# Altium PCB PCB1.PcbDoc
Units mil, origin at the board's own origin, x right, y up, seen from the top; angles counter-clockwise.
Board outline 3260 x 2455 mil, 2 copper layers (Top Layer, Bottom Layer); 47 components, 53 nets, 249 pads, 18 vias.
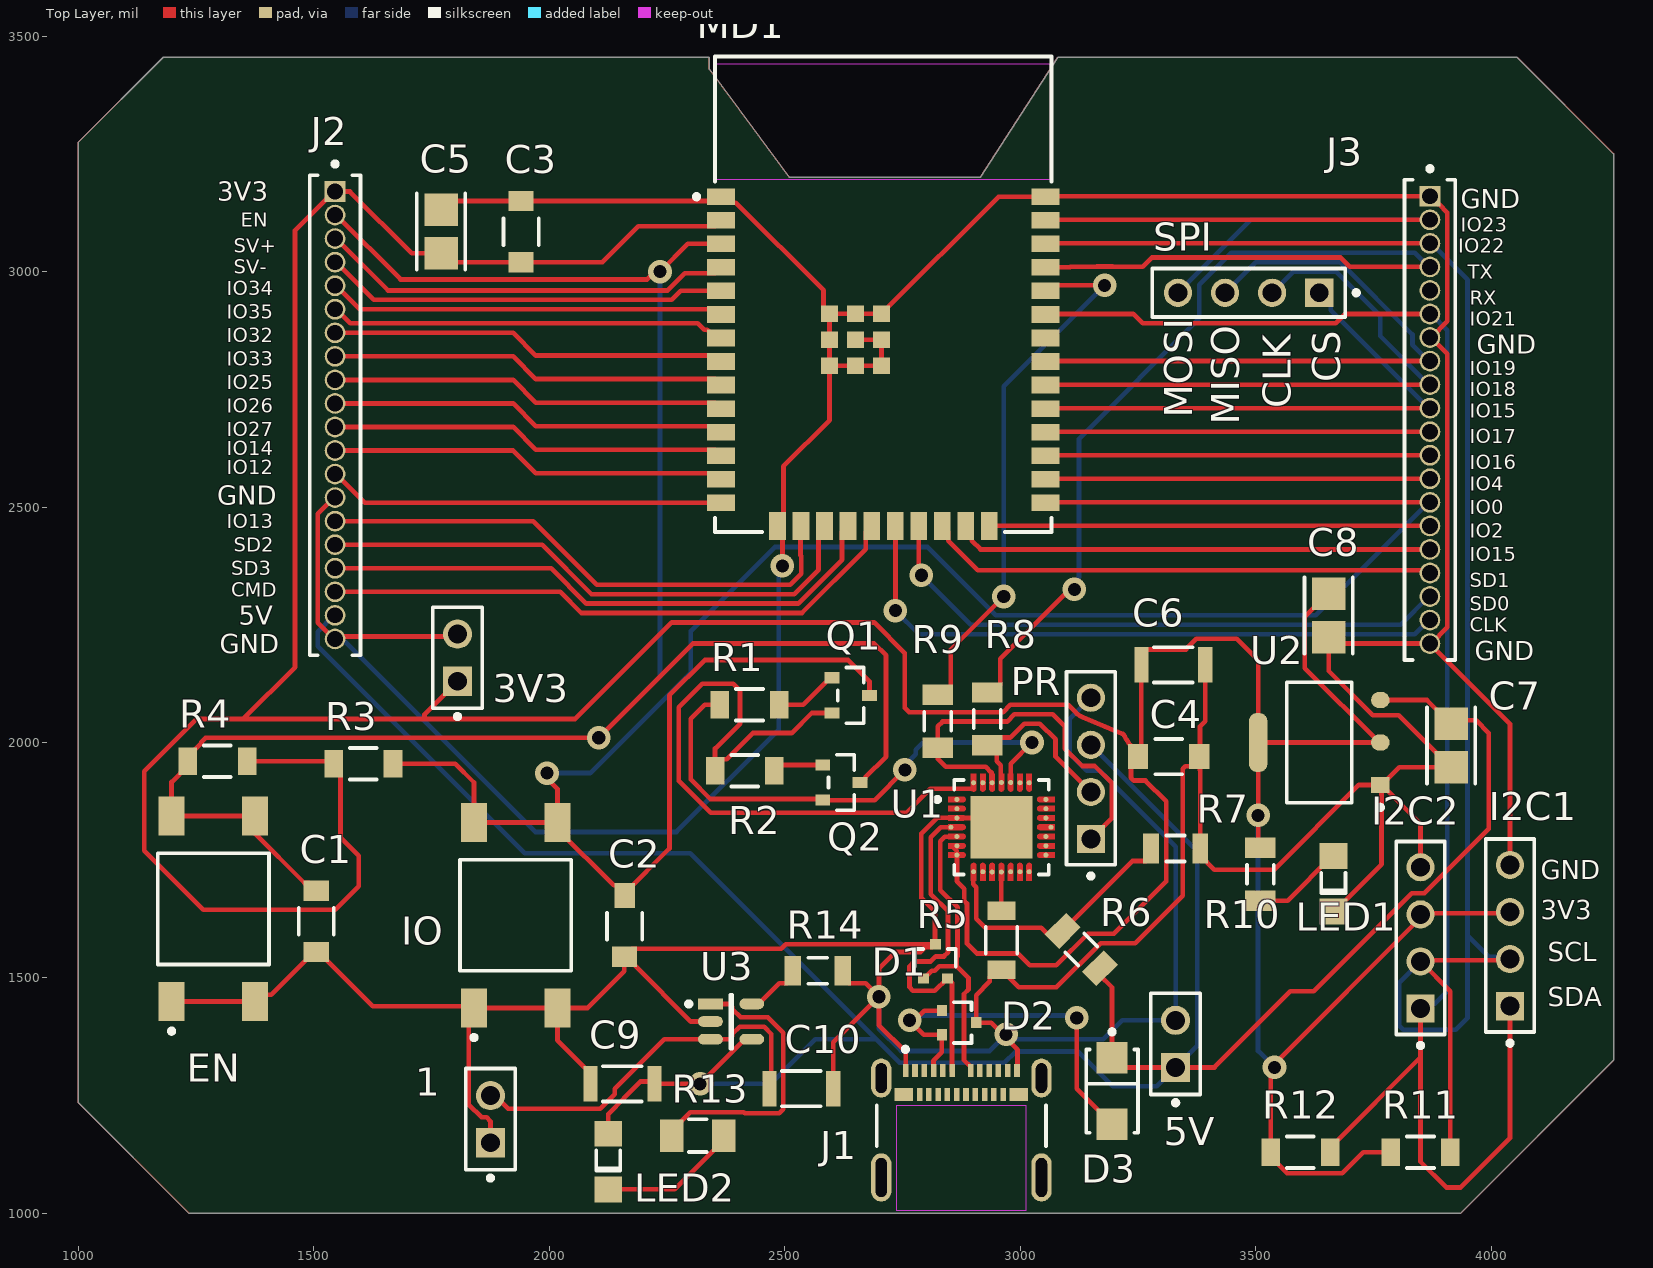
[diagram p0: Top Layer view]
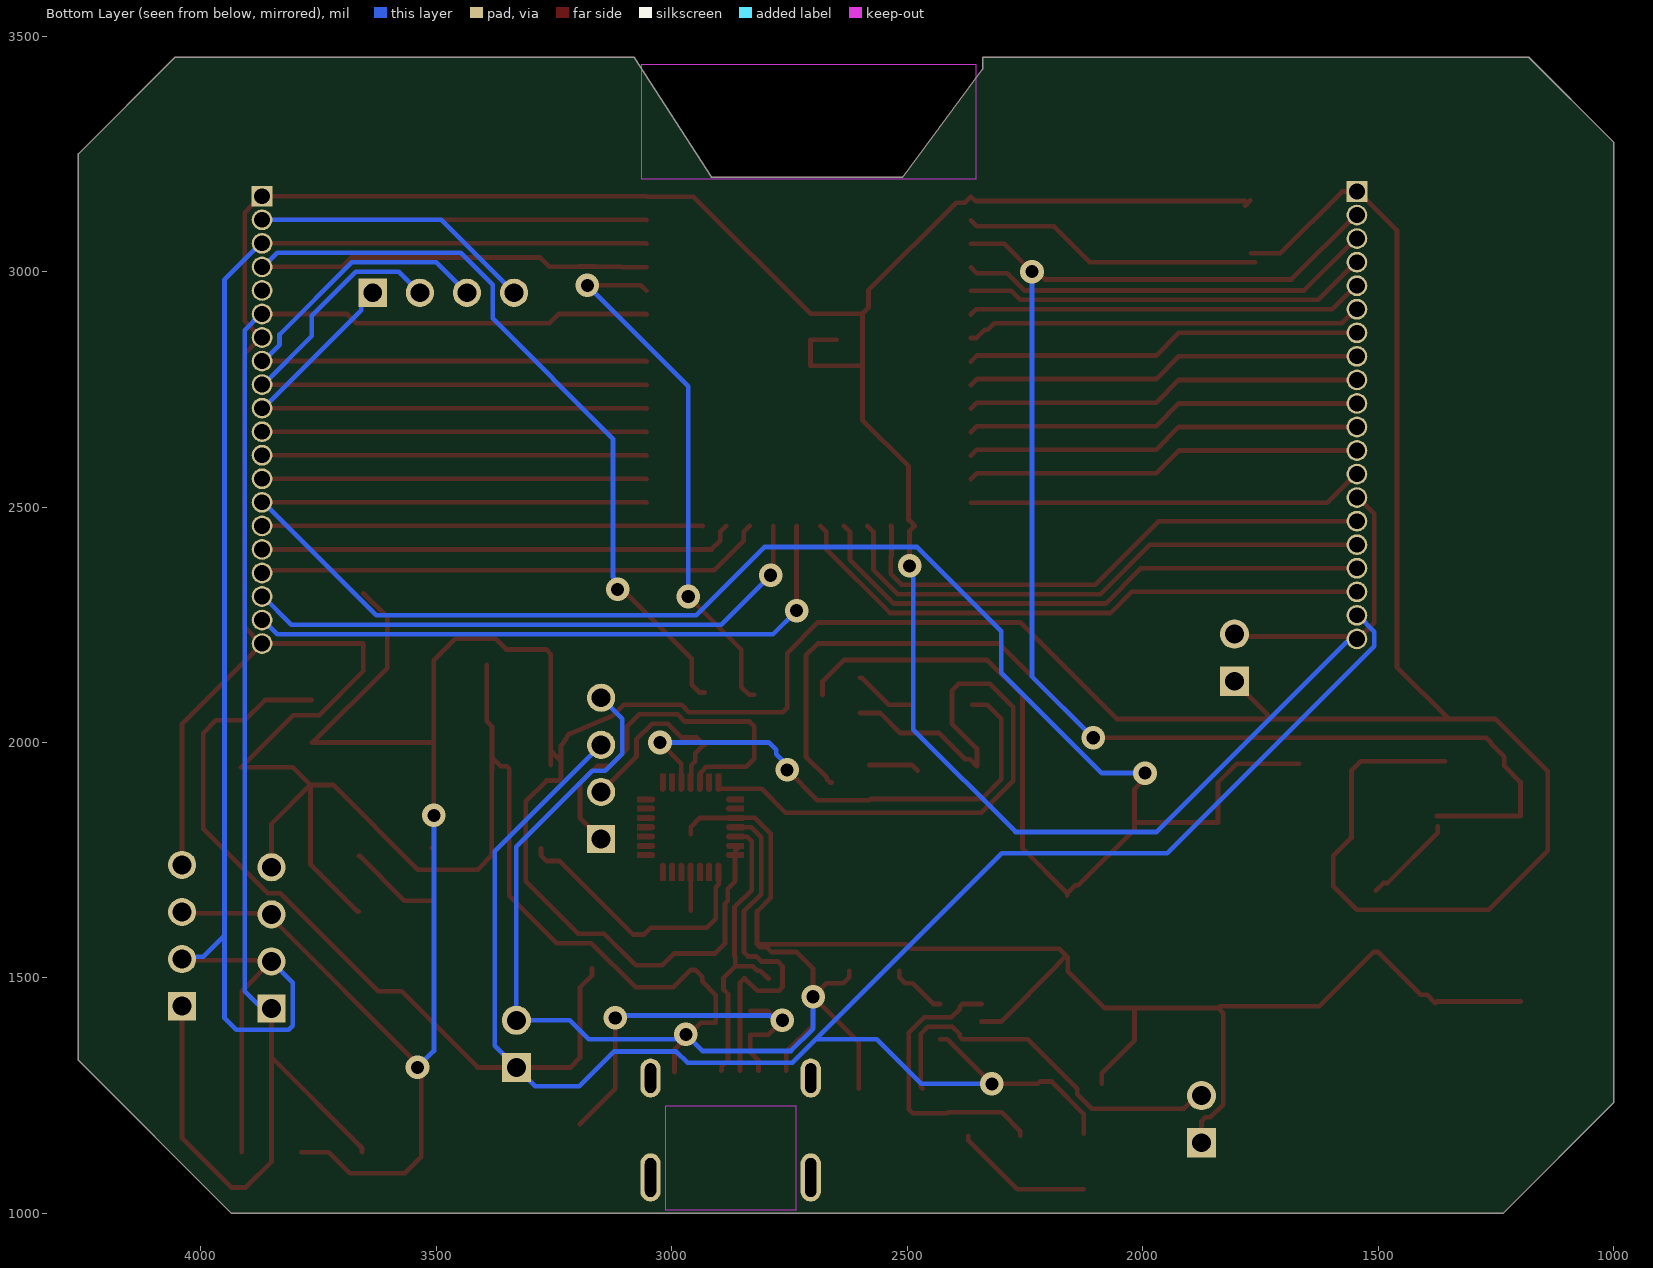
[diagram p1: Bottom Layer view, seen from below]
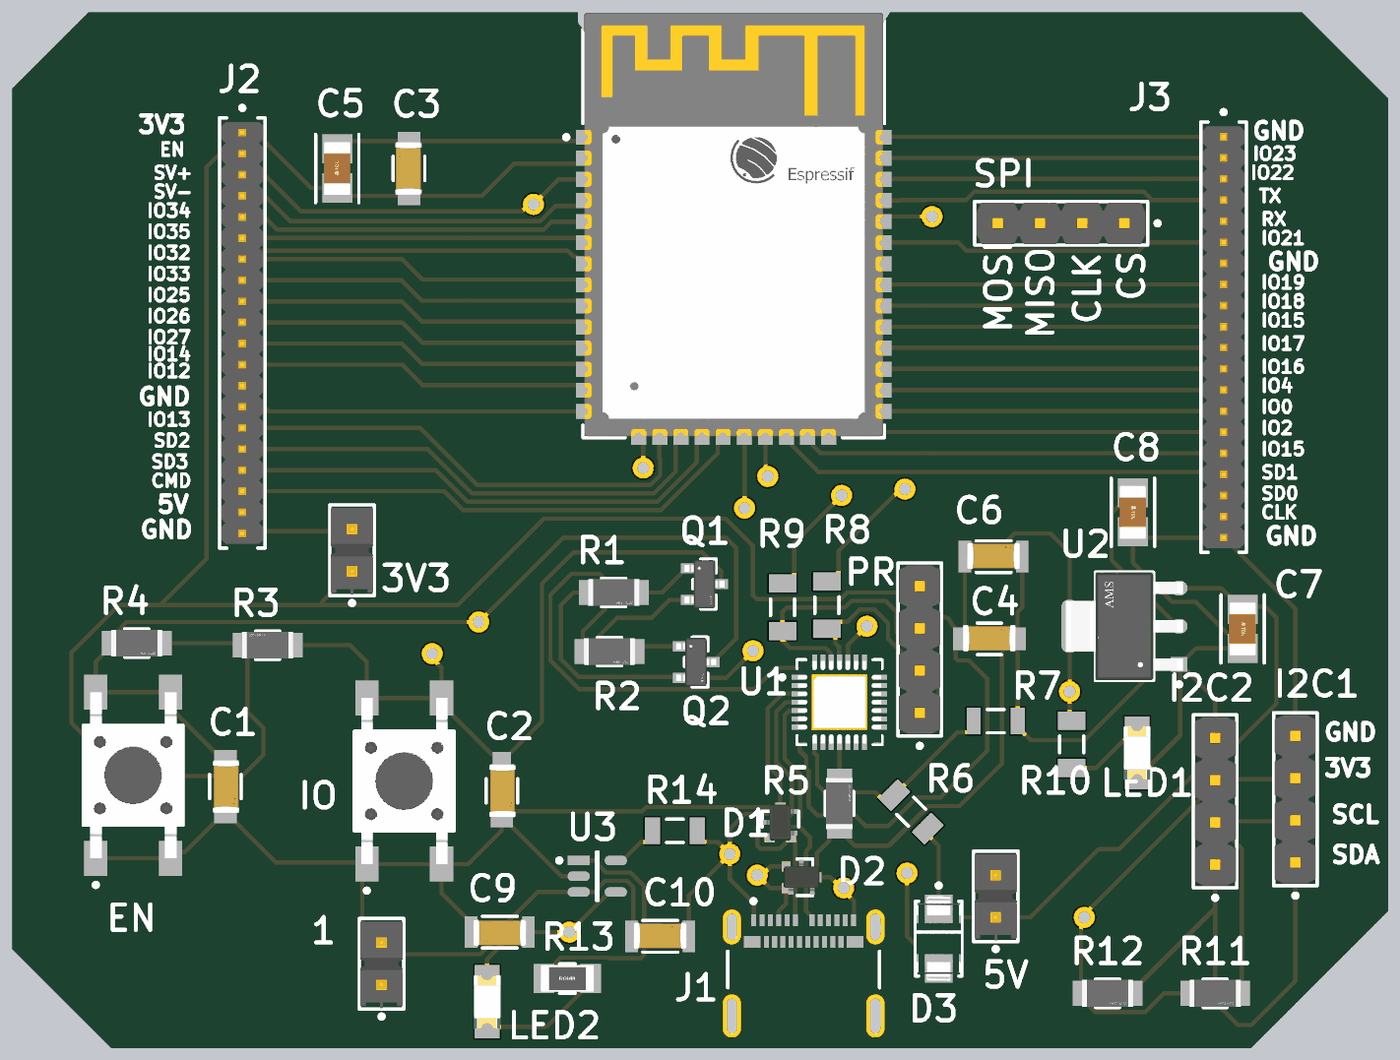
[diagram p2: 3D render of the assembled board from above, using the file's embedded part models]

## Layer stack, top to bottom
Top Solder: solder mask 0.4, Solder Resist, Dk 3.5
Top Layer: signal copper 1.4
Dielectric 1: dielectric 12.6, FR-4, Dk 4.8
Bottom Layer: signal copper 1.4
Bottom Solder: solder mask 0.4, Solder Resist, Dk 3.5

## Board outline
1000,3275 1180,3455 2340,3455 2340,3430 2510,3200 2915,3200 3080,3455 4055,3455 4260,3250 4260,1325 3935,1000 1235,1000 1000,1235

## Design rules (kind name [scope] priority, off if disabled: settings)
Clearance [All] p1: gap=10 ignorepadtopadclearanceinfootprint=FALSE except(0: Arc-Hole Track-Hole SMDPad-Hole THPad-Hole Via-Hole Fill-Hole Poly-Hole Region-Hole Text-Hole)
PolygonConnect [All] p1: connectstyle=Relief reliefconductorwidth=10 reliefentries=4 polygonreliefangle="90 Angle" airgapwidth=10
RoomDefinition PCB1 [InComponentClass('PCB1')] p1: confinementstyle=ConfineIn formatcopy=TRUE lockcomponents=FALSE outline 7045,1065 7850,1065 7850,2220 7045,2220
RoutingVias [All] p1: holewidth=28 width=50 viastyle="Through Hole" minholewidth=28 minwidth=50 maxholewidth=28 maxwidth=50
SolderMaskExpansion [All] p1: expansion=4 istentingtop=FALSE
Width [All] p1: maxlimit=10 minlimit=10 preferedwidth=10
30 further rules are at their usual default settings.

## Components (designator, comment, footprint, x,y, rotation, side; value= is the part's Value field where it differs from the comment)
1 "CRGR" FP-TSW-102-07-F-S-MFG 1875,1200 r90 top
3V3 "BAT33" FP-TSW-102-07-F-S-MFG 1805,2180 r90 top
5V "BAT5" FP-TSW-102-07-F-S-MFG 3330,1360 r90 top
C1 "0.1u" FP-CGA5L-0_3-0_1-MFG#1 1505,1620 r270 top
C2 "0.1u" FP-CGA5L-0_3-0_1-MFG#2 2160,1610 r270 top
C3 "0.1u" FP-CGA5L-0_3-0_1-MFG#1 1940,3085 r90 top
C4 "0.1u" FP-CGA5L-0_3-0_1-MFG#1 3315,1970 r0 top
C5 "22u" FP-C3216-160-0_2-IPC_B 1770,3085 r90 top
C6 "4.7u" FP-CGA5L-0_3-0_1-IPC_B 3325,2165 r0 top
C7 "22u" FP-C3216-160-0_2-IPC_B 3915,1993.7 r270 top
C8 "22u" FP-C3216-160-0_2-IPC_B 3655,2270 r270 top
C9 "4.7u" FP-CGA5L-0_3-0_1-IPC_B 2155,1275 r180 top
C10 "4.7u" FP-CGA5L-0_3-0_1-IPC_B 2535,1265 r0 top
D1 "PESD1CAN-UX" FP-SOT323-MFG 2820,1535 r90 top
D2 "PESD1CAN-UX" FP-SOT323-MFG 2870,1405 r0 top
D3 "SS14-E3/61T" FP-95400-MFG 3195,1259.53 r270 top
EN "1301.9315.24" FP-1301_9315_24-MFG 1286.42,1646.85 r90 top
I2C1 "I2C" FP-MTLW-104-05-G-S-185-MFG 4040,1590 r90 top
I2C2 "I2C" FP-MTLW-104-05-G-S-185-MFG 3850,1585 r90 top
IO "1301.9315.24" FP-1301_9315_24-MFG 1928.58,1633.15 r90 top
J1 "USB-C" FP-1054500101-MFG 2875,1155 r0 top
J2 "M52-040023V2045" FP-M52-040023V2045-MFG 1545,2695 r270 top
J3 "M52-040023V2045" FP-M52-040023V2045-MFG 3870,2685 r270 top
LED1 "Green" 1206_A 3665,1700 r90 top
LED2 "Green" 1206_A 2125,1110 r90 top
MD1 "ESP32-WROOM-32E (4MB)" FP-ESP32-WROOM-32E_4MB-MFG 2709.17,2951.97 r0 top
PR "PROG" FP-MTLW-104-05-G-S-185-MFG 3150,1945 r90 top
Q1 "SS8050-G" FP-SS8050-G-MFG 2640,2100 r0 top
Q2 "SS8050-G" FP-SS8050-G-MFG 2620.24,1915 r0 top
R1 "10K" FP-AC1206-MFG 2425,2080 r0 top value=10KΩ
R2 "10K" FP-AC1206-MFG 2415,1940 r0 top value=10KΩ
R3 "10K" FP-AC1206-MFG 1605,1955 r180 top value=10KΩ
R4 "10K" FP-AC1206-MFG 1295,1960 r0 top value=10KΩ
R5 "10K" FP-AC1206-MFG 2960,1580 r90 top value=10KΩ
R6 "22.1K" RESC3216X70X50NL05T20 3129.67,1560.33 r135 top
R7 "47.5K" RESC3116X65X40LL10T20 3330,1775 r180 top
R8 "ERJ-8GEY0R00V" RESC3216X70X50NL05T20 2930,2050 r90 top
R9 "ERJ-8GEY0R00V" RESC3216X70X50NL05T20 2825,2045 r90 top
R10 "4.7k" RESC3216X70X50NL05T20 3510,1720 r270 top
R11 "10K" FP-AC1206-MFG 3850,1130 r0 top value=10KΩ
R12 "10K" FP-AC1206-MFG 3595,1130 r0 top value=10KΩ
R13 "470" FP-MCR18-IPC_B 2315,1165 r0 top
R14 "2k" RESC3216X60X45LL10T20 2570,1515 r180 top
SPI "SPI" FP-MTLW-104-05-G-S-185-MFG 3485,2955 r180 top
U1 "CP2102N-A01-GQFN28" FP-CP2102N-A01-GQFN28-MFG 2960,1820 r0 top
U2 "AMS1117-3.3" FP-AMS1117-IPC_C 3635,2000 r180 top
U3 "MCP73831T-2ACI/OT" FP-C04-091-OT-IPC_B 2386.05,1407.4 r0 top

## Footprints (in the part's own frame and the unit in brackets; to place one, negate y for a bottom-side part, rotate by r counter-clockwise, add the part's x,y. Pads: shape width x height; smd on the part's side, far side on the other; paste and mask are expansions set on the pad)
1206_A [mm] "Chip LED, 2-Leads, Body 3.2x1.6mm, IPC Medium Density"
  rect 1.4x1.5 smd: 1(-1.5,0) 2(1.5,0)
  silkscreen extent -0.5,-0.67 0.6,0.65, body extent -1.6,-0.8 1.6,0.8, height 0.68
FP-1301_9315_24-MFG [mm]
  rect 2.1x1.4 smd paste+0 mask+0: 1(-5,2.25) 2(5,2.25) 3(-5,-2.25) 4(5,-2.25)
  silkscreen extent -6.72,-3 3,3, body extent -6.15,-3.1 6.15,3.1, height 0.25
FP-95400-MFG [mm]
  rect 1.7x1.68 smd paste+0 mask+0: 1(-1.79,0) 2(1.79,0)
  silkscreen extent -3.32,-1.4 2.25,1.4, body extent -2.74,-1.5 2.74,1.5, height 0.25
FP-1054500101-MFG [mm]
  rrect100% 1.1x2.1 hole 1.6 slot 0.6 at 0 deg paste-1000 mask+0: 1(-4.32,3.36) 2(4.32,3.36)
  rrect100% 1.1x2.6 hole 2.1 slot 0.6 at 0 deg paste-1000 mask+0: 3(-4.32,-2) 4(4.32,-2)
  rect 0.3x0.7 smd paste+0 mask+0: A1(-3,3.77) A2(-2.5,3.77) A3(-2,3.77) A4(-1.5,3.77) A5(-1,3.77) A6(-0.5,3.77) A7(0.5,3.77) A8(1,3.77) A9(1.5,3.77) A10(2,3.77) A11(2.5,3.77) A12(3,3.77) B2(2.25,2.47) B3(1.75,2.47) B4(1.25,2.47) B5(0.75,2.47) B6(0.25,2.47) B7(-0.25,2.47) B8(-0.75,2.47) B9(-1.25,2.47) B10(-1.75,2.47) B11(-2.25,2.47)
  rect 1x0.7 smd paste+0 mask+0: B1(3.1,2.47) B12(-3.1,2.47)
  Keep-Out Layer region: -3.5,-3.77 3.5,-3.77 3.5,1.88 -3.5,1.88
  silkscreen extent -4.57,-0.3 4.57,5.03
FP-AC1206-MFG [mm]
  rect 1x1.5 smd paste+0 mask+0: 1(-1.6,0) 2(1.6,0)
  silkscreen extent -0.72,-0.85 0.72,0.85, body extent -2.2,-0.95 2.2,0.95, height 0.25
FP-AMS1117-IPC_C [mm]
  rect 1.004x0.872 smd paste+0 mask+0: 1(-3.295,2.29)
  rrect100% 1.004x0.872 smd paste+0 mask+0: 2(-3.295,0) 3(-3.295,-2.29)
  rrect87% 1.004x3.182 smd paste+0 mask+0: 4(3.295,0)
  silkscreen extent -3.42,-3.25 1.75,3.62, body extent -3.9,-3.35 3.9,3.35, height 0.25
FP-C04-091-OT-IPC_B [mm]
  rect 1.338x0.578 smd paste+0 mask+0: 1(-1.116,0.95)
  rrect100% 1.338x0.578 smd paste+0 mask+0: 2(-1.116,0) 3(-1.116,-0.95) 4(1.116,-0.95) 5(1.116,0.95)
  silkscreen extent -2.41,-1.45 0.05,1.45
FP-C3216-160-0_2-IPC_B [mil]
  rect 69.05x71.11 smd paste+0 mask+0: 1(-46.3,0) 2(46.3,0)
  silkscreen extent -81,-51 81,51, body extent -91,-45 91,45, height 10
FP-CGA5L-0_3-0_1-IPC_B [mm]
  rect 0.756x1.906 smd paste+0 mask+0: 1(-1.725,0) 2(1.725,0)
  silkscreen extent -1.05,-0.95 1.05,0.95, body extent -2.35,-1.2 2.35,1.2, height 0.25
FP-CGA5L-0_3-0_1-MFG#1 [mm]
  rect 1.1x1.35 smd paste+0 mask+0: 1(-1.65,0) 2(1.65,0)
  silkscreen extent -0.72,-0.95 0.72,0.95, body extent -2.3,-1.05 2.3,1.05, height 0.25
FP-CGA5L-0_3-0_1-MFG#2 [mm]
  rect 1.35x1.1 smd paste+0 mask+0: 1(-1.65,0)
  rect 1.1x1.35 smd paste+0 mask+0: 2(1.65,0)
  silkscreen extent -0.72,-0.95 0.72,0.95, body extent -2.3,-1.05 2.3,1.05, height 0.25
FP-CP2102N-A01-GQFN28-MFG [mm]
  round 0.27 smd paste+0 mask+0: 1(-2.4,1.5) 2(-2.4,1) 3(-2.4,0.5) 4(-2.725,0) 5(-2.4,-0.5) 6(-2.4,-1) 7(-2.4,-1.5) 8(-1.5,-2.4) 9(-1,-2.4) 10(-0.5,-2.416) 11(0,-2.416) 12(0.5,-2.4) 13(1,-2.4) 14(1.5,-2.4) 15(2.4,-1.5) 16(2.4,-1) 17(2.4,-0.5) 18(2.675,0) 19(2.4,0.5) 20(2.4,1) 21(2.4,1.5) 22(1.5,2.4) 23(1,2.4) 24(0.5,2.416) 25(0,2.416) 26(-0.5,2.4) 27(-1,2.4) 28(-1.5,2.4)
  rect 3.35x3.35 smd paste-1000 mask+0: 29(0,0)
  Top Layer region: -2.875,1.65 -2.075,1.65 -2.018,1.639 -1.969,1.606 -1.936,1.557 -1.925,1.5 -1.925,1.5 -1.936,1.443 -1.969,1.394 -2.018,1.361 -2.075,1.35 -2.075,1.35 -2.875,1.35
  Top Layer region: -2.875,1.15 -2.075,1.15 -2.018,1.139 -1.969,1.106 -1.936,1.057 -1.925,1 -1.925,1 -1.936,0.943 -1.969,0.894 -2.018,0.861 -2.075,0.85 -2.075,0.85 -2.875,0.85
  Top Layer region: -2.875,0.65 -2.075,0.65 -2.018,0.639 -1.969,0.606 -1.936,0.557 -1.925,0.5 -1.925,0.5 -1.936,0.443 -1.969,0.394 -2.018,0.361 -2.075,0.35 -2.075,0.35 -2.875,0.35
  Top Layer region: -2.875,0.15 -2.075,0.15 -2.018,0.139 -1.969,0.106 -1.936,0.057 -1.925,0 -1.925,0 -1.936,-0.057 -1.969,-0.106 -2.018,-0.139 -2.075,-0.15 -2.075,-0.15 -2.875,-0.15
  Top Layer region: -2.875,-0.35 -2.075,-0.35 -2.018,-0.361 -1.969,-0.394 -1.936,-0.443 -1.925,-0.5 -1.925,-0.5 -1.936,-0.557 -1.969,-0.606 -2.018,-0.639 -2.075,-0.65 -2.075,-0.65 -2.875,-0.65
  Top Layer region: -2.875,-0.85 -2.075,-0.85 -2.018,-0.861 -1.969,-0.894 -1.936,-0.943 -1.925,-1 -1.925,-1 -1.936,-1.057 -1.969,-1.106 -2.018,-1.139 -2.075,-1.15 -2.075,-1.15 -2.875,-1.15
  Top Layer region: -2.875,-1.35 -2.075,-1.35 -2.018,-1.361 -1.969,-1.394 -1.936,-1.443 -1.925,-1.5 -1.925,-1.5 -1.936,-1.557 -1.969,-1.606 -2.018,-1.639 -2.075,-1.65 -2.075,-1.65 -2.875,-1.65
  Top Layer region: -1.65,-2.875 -1.65,-2.075 -1.639,-2.018 -1.606,-1.969 -1.557,-1.936 -1.5,-1.925 -1.5,-1.925 -1.443,-1.936 -1.394,-1.969 -1.361,-2.018 -1.35,-2.075 -1.35,-2.075 -1.35,-2.875
  Top Layer region: -1.15,-2.875 -1.15,-2.075 -1.139,-2.018 -1.106,-1.969 -1.057,-1.936 -1,-1.925 -1,-1.925 -0.943,-1.936 -0.894,-1.969 -0.861,-2.018 -0.85,-2.075 -0.85,-2.075 -0.85,-2.875
  Top Layer region: -0.65,-2.875 -0.65,-2.075 -0.639,-2.018 -0.606,-1.969 -0.557,-1.936 -0.5,-1.925 -0.5,-1.925 -0.443,-1.936 -0.394,-1.969 -0.361,-2.018 -0.35,-2.075 -0.35,-2.075 -0.35,-2.875
  Top Layer region: -0.15,-2.875 -0.15,-2.075 -0.139,-2.018 -0.106,-1.969 -0.057,-1.936 0,-1.925 0,-1.925 0.057,-1.936 0.106,-1.969 0.139,-2.018 0.15,-2.075 0.15,-2.075 0.15,-2.875
  Top Layer region: 0.35,-2.875 0.35,-2.075 0.361,-2.018 0.394,-1.969 0.443,-1.936 0.5,-1.925 0.5,-1.925 0.557,-1.936 0.606,-1.969 0.639,-2.018 0.65,-2.075 0.65,-2.075 0.65,-2.875
  Top Layer region: 0.85,-2.875 0.85,-2.075 0.861,-2.018 0.894,-1.969 0.943,-1.936 1,-1.925 1,-1.925 1.057,-1.936 1.106,-1.969 1.139,-2.018 1.15,-2.075 1.15,-2.075 1.15,-2.875
  Top Layer region: 1.35,-2.875 1.35,-2.075 1.361,-2.018 1.394,-1.969 1.443,-1.936 1.5,-1.925 1.5,-1.925 1.557,-1.936 1.606,-1.969 1.639,-2.018 1.65,-2.075 1.65,-2.075 1.65,-2.875
  Top Layer region: 2.875,-1.65 2.075,-1.65 2.018,-1.639 1.969,-1.606 1.936,-1.557 1.925,-1.5 1.925,-1.5 1.936,-1.443 1.969,-1.394 2.018,-1.361 2.075,-1.35 2.075,-1.35 2.875,-1.35
  Top Layer region: 2.875,-1.15 2.075,-1.15 2.018,-1.139 1.969,-1.106 1.936,-1.057 1.925,-1 1.925,-1 1.936,-0.943 1.969,-0.894 2.018,-0.861 2.075,-0.85 2.075,-0.85 2.875,-0.85
  Top Layer region: 2.875,-0.65 2.075,-0.65 2.018,-0.639 1.969,-0.606 1.936,-0.557 1.925,-0.5 1.925,-0.5 1.936,-0.443 1.969,-0.394 2.018,-0.361 2.075,-0.35 2.075,-0.35 2.875,-0.35
  Top Layer region: 2.875,-0.15 2.075,-0.15 2.018,-0.139 1.969,-0.106 1.936,-0.057 1.925,0 1.925,0 1.936,0.057 1.969,0.106 2.018,0.139 2.075,0.15 2.075,0.15 2.875,0.15
  Top Layer region: 2.875,0.35 2.075,0.35 2.018,0.361 1.969,0.394 1.936,0.443 1.925,0.5 1.925,0.5 1.936,0.557 1.969,0.606 2.018,0.639 2.075,0.65 2.075,0.65 2.875,0.65
  Top Layer region: 2.875,0.85 2.075,0.85 2.018,0.861 1.969,0.894 1.936,0.943 1.925,1 1.925,1 1.936,1.057 1.969,1.106 2.018,1.139 2.075,1.15 2.075,1.15 2.875,1.15
  Top Layer region: 2.875,1.35 2.075,1.35 2.018,1.361 1.969,1.394 1.936,1.443 1.925,1.5 1.925,1.5 1.936,1.557 1.969,1.606 2.018,1.639 2.075,1.65 2.075,1.65 2.875,1.65
  Top Layer region: 1.65,2.875 1.65,2.075 1.639,2.018 1.606,1.969 1.557,1.936 1.5,1.925 1.5,1.925 1.443,1.936 1.394,1.969 1.361,2.018 1.35,2.075 1.35,2.075 1.35,2.875
  Top Layer region: 1.15,2.875 1.15,2.075 1.139,2.018 1.106,1.969 1.057,1.936 1,1.925 1,1.925 0.943,1.936 0.894,1.969 0.861,2.018 0.85,2.075 0.85,2.075 0.85,2.875
  Top Layer region: 0.65,2.875 0.65,2.075 0.639,2.018 0.606,1.969 0.557,1.936 0.5,1.925 0.5,1.925 0.443,1.936 0.394,1.969 0.361,2.018 0.35,2.075 0.35,2.075 0.35,2.875
  Top Layer region: 0.15,2.875 0.15,2.075 0.139,2.018 0.106,1.969 0.057,1.936 0,1.925 0,1.925 -0.057,1.936 -0.106,1.969 -0.139,2.018 -0.15,2.075 -0.15,2.075 -0.15,2.875
  Top Layer region: -0.35,2.875 -0.35,2.075 -0.361,2.018 -0.394,1.969 -0.443,1.936 -0.5,1.925 -0.5,1.925 -0.557,1.936 -0.606,1.969 -0.639,2.018 -0.65,2.075 -0.65,2.075 -0.65,2.875
  Top Layer region: -0.85,2.875 -0.85,2.075 -0.861,2.018 -0.894,1.969 -0.943,1.936 -1,1.925 -1,1.925 -1.057,1.936 -1.106,1.969 -1.139,2.018 -1.15,2.075 -1.15,2.075 -1.15,2.875
  Top Layer region: -1.35,2.875 -1.35,2.075 -1.361,2.018 -1.394,1.969 -1.443,1.936 -1.5,1.925 -1.5,1.925 -1.557,1.936 -1.606,1.969 -1.639,2.018 -1.65,2.075 -1.65,2.075 -1.65,2.875
  silkscreen extent -3.57,-2.55 2.55,2.55, body extent -2.98,-2.98 2.98,2.98, height 0.25
FP-ESP32-WROOM-32E_4MB-MFG [mm]
  rect 1.5x0.9 smd paste+0 mask+0: 1(-8.75,5.26) 2(-8.75,3.99) 3(-8.75,2.72) 4(-8.75,1.45) 5(-8.75,0.18) 6(-8.75,-1.09) 7(-8.75,-2.36) 8(-8.75,-3.63) 9(-8.75,-4.9) 10(-8.75,-6.17) 11(-8.75,-7.44) 12(-8.75,-8.71) 13(-8.75,-9.98) 14(-8.75,-11.25) 25(8.75,-11.25) 26(8.75,-9.98) 27(8.75,-8.71) 28(8.75,-7.44) 29(8.75,-6.17) 30(8.75,-4.9) 31(8.75,-3.63) 32(8.75,-2.36) 33(8.75,-1.09) 34(8.75,0.18) 35(8.75,1.45) 36(8.75,2.72) 37(8.75,3.99) 38(8.75,5.26)
  rect 0.9x1.5 smd paste+0 mask+0: 15(-5.71,-12.5) 16(-4.44,-12.5) 17(-3.17,-12.5) 18(-1.9,-12.5) 19(-0.63,-12.5) 20(0.64,-12.5) 21(1.91,-12.5) 22(3.18,-12.5) 23(4.45,-12.5) 24(5.72,-12.5)
  rect 0.9x0.9 smd paste+0 mask+0: 39(-2.9,-3.86) 39(-2.9,-2.46) 39(-2.9,-1.06) 39(-1.5,-3.86) 39(-1.5,-2.46) 39(-1.5,-1.06) 39(-0.1,-3.86) 39(-0.1,-2.46) 39(-0.1,-1.06)
  Keep-Out Layer region: -9,6.205 9,6.205 9,12.395 -9,12.395
  Keep-Out Layer region: -9,6.205 9,6.205 9,12.395 -9,12.395
  silkscreen extent -10.2,-12.83 9.08,12.83, body extent -9.6,-13.35 9.6,12.93, height 0.25
FP-M52-040023V2045-MFG [mm]
  rect 1.12x1.12 hole 0.85 paste-1000 mask+0: 1(-12.065,0)
  round 1.12 hole 0.85 paste-1000 mask+0: 2(-10.795,0) 3(-9.525,0) 4(-8.255,0) 5(-6.985,0) 6(-5.715,0) 7(-4.445,0) 8(-3.175,0) 9(-1.905,0) 10(-0.635,0) 11(0.635,0) 12(1.905,0) 13(3.175,0) 14(4.445,0) 15(5.715,0) 16(6.985,0) 17(8.255,0) 18(9.525,0) 19(10.795,0) 20(12.065,0)
  silkscreen extent -13.67,-1.37 12.95,1.37, body extent -13.05,-1.47 13.05,1.47, height 0.25
FP-MCR18-IPC_B [mil]
  rect 49.44x69.22 smd paste+0 mask+0: 1(-55.17,0) 2(55.17,0)
  silkscreen extent -19,-35 19,35, body extent -90,-44 90,44, height 10
FP-MTLW-104-05-G-S-185-MFG [mm]
  rect 1.52x1.52 hole 1.02 paste-1000 mask+0: 1(-3.81,0)
  round 1.52 hole 1.02 paste-1000 mask+0: 2(-1.27,0) 3(1.27,0) 4(3.81,0)
  silkscreen extent -5.93,-1.31 5.21,1.31, body extent -5.31,-1.41 5.31,1.41, height 0.25
FP-SOT323-MFG [mm]
  rect 0.55x0.6 smd paste-1000 mask+0: 1(-0.925,0.65) 2(-0.925,-0.65) 3(0.925,0)
  silkscreen extent -0.28,-1.1 0.67,1.1, body extent -1.33,-1.2 1.33,1.2, height 0.25
FP-SS8050-G-MFG [mm]
  rect 0.8x0.6 smd paste+0 mask+0: 1(-1.01,0.95) 2(-1.01,-0.95) 3(1.01,0)
  silkscreen extent -0.7,-1.5 0.7,1.5, body extent -1.51,-1.6 1.51,1.6, height 0.25
FP-TSW-102-07-F-S-MFG [mm]
  rect 1.57x1.57 hole 1.02 paste-1000 mask+0: 1(-1.27,0)
  round 1.57 hole 1.02 paste-1000 mask+0: 2(1.27,0)
  silkscreen extent -3.3,-1.34 2.73,1.34, body extent -2.83,-1.44 2.83,1.44, height 0.25
RESC3116X65X40LL10T20 [mm] "Chip Resistor, 2-Leads, Body 3.10x1.60mm, IPC High Density"
  rect 0.85x1.6 smd: 1(-1.325,0) 2(1.325,0)
  silkscreen extent -0.5,-0.7 0.5,0.7, body extent -1.6,-0.85 1.6,0.85, height 0.65
RESC3216X60X45LL10T20 [mm] "Chip Resistor, 2-Leads, Body 3.20x1.60mm, IPC High Density"
  rect 0.9x1.6 smd: 1(-1.35,0) 2(1.35,0)
  silkscreen extent -0.5,-0.7 0.5,0.7, body extent -1.65,-0.85 1.65,0.85, height 0.6
RESC3216X70X50NL05T20 [mm] "Chip Resistor, 2-Leads, Body 3.20x1.60mm, IPC Medium Density"
  rect 1.1x1.65 smd: 1(-1.425,0) 2(1.425,0)
  silkscreen extent -0.5,-0.73 0.5,0.73, body extent -1.63,-0.82 1.62,0.82, height 0.7

## Part data
1 3V3 5V: library part CMP-02766-001458-1, "CONN HEADER VERT 2POS 2.54MM", Color=Black, Flammability Rating="UL94 V-0", Max Current Rating=7.6A, Max Operating Temperature=125°C, Max Voltage Rating (AC)=550V, Min Operating Temperature=-55°C, Package Quantity=1, Connector Type=Header, Contact Finish - Mating=GOLD, Contact Material=Bronze, Contact Mating Length=0.23inch, Contact Plating=Gold, Contact Shape=Square, Contact Type="Male Pin", Depth=2.54mm, Fastening Type=Pull, Gender=Male, Housing Color=Black, Housing Material=Polyester, Insulation Color=Black, Insulation Material=PBT, Length=5.08mm, Mount="Through Hole", Number of Contacts=2, Number of Positions=2, Number of Rows=1, Orientation=Straight, Packaging=Bulk, Pitch=2.54mm, Radiation Hardening=No, REACH SVHC="No SVHC", RoHS Compliant=Yes, Series=TSW, Termination=Solder
C1 C2 C3 C4: library part CMP-08246-001942-1, "Cap Ceramic 100nF 450V X7T 10% Pad SMD 1206 +125°C Automotive T/R", Capacitance=100nF, Case Code (Imperial)=1206, Case Code (Metric)=3216, Dielectric=X7T, Max Operating Temperature=125°C, Min Operating Temperature=-55°C, Tolerance=10%, Voltage Rating=450V, Case/Package=1206, Lead Free="Lead Free", Packaging="Tape and Reel", Termination=SMD/SMT, Voltage Rating (DC)=450V
C5 C7 C8: library part CMP-08246-004697-1, "Multilayer Ceramic Capacitors 22uF ±20% 25V X5R SMD 1206", Capacitance=22uF, Case Code (Imperial)=1206, Case Code (Metric)=3216, Dielectric=X5R, Dielectric Material=Ceramic, Max Operating Temperature=85°C, Min Operating Temperature=-55°C, Package Quantity=1, Tolerance=20%, Voltage Rating=25V, Case/Package=1206, Construction=Flat, Depth=1.6mm, Height=1.6mm, Lead Free="Lead Free", Length=3.2mm, Mount="Surface Mount", Packaging="Tape and Reel", REACH SVHC="No SVHC", Resistor Type=Ceramic, RoHS Compliant=Yes, Series=C, Termination=SMD/SMT, Thickness=0.071inch, Voltage Rating (DC)=25V, Weight=0.000571oz, Width=0.063inch
C6 C9 C10: library part CMP-08246-001672-1, "Cap Ceramic 4.7uF 35V X7R 10% Pad SMD 1206 +125°C Automotive T/R", Capacitance=4.7uF, Case Code (Imperial)=1206, Case Code (Metric)=3216, Dielectric=X7R, Max Operating Temperature=125°C, Min Operating Temperature=-55°C, Package Quantity=1, Ratings=AEC-Q200, Tolerance=10%, Voltage Rating=35V, Case/Package=1206, Composition=Ceramic, Depth=1.6mm, Height=1.6mm, Length=3.2mm, Mount="Surface Mount", Packaging="Tape and Reel", Termination=SMD/SMT, Thickness=0.075inch, Voltage Rating (DC)=35V, Weight=0.000571oz, Width=1.6mm
D1 D2: library part CMP-14436-000006-1, "TVS DIODE 24V 50V SC70-3"
D3: library part CMP-02539-000035-1, "DIODE SCHOTTKY 40V 1A DO214AC", Forward Current=1A, Manufacturer=Vishay, Max Junction Temp=+150°C, Max Repetitive Reverse Voltage=40V, Max Surge Forward Current=40A, Package=95400, Peak Reverse Current=0.2mA, Temperature="-65°C to +150°C", Temperature Range Low=-65°C, Automotive=No, Category=Diode, ComponentLink2Description=Datasheet, ComponentLink2URL=http://www.vishay.com/docs/88746/ss12.pdf, Device Class L1="Discrete Semiconductors", Device Class L2=Diodes, Device Class L3="Schottky Diodes", Digikey Description="DIODE SCHOTTKY 40V 1A DO214AC", Footprint Url=http://www.vishay.com/docs/95400/sma.pdf, Height=2.29mm, Lead Free=Yes, Manufacturer Part Number=SS14-E3/61T, Mouser Description="SS14 Series 40 V 1 A Surface Mount Schottky Barrier Rectifier - DO-214AC (SMA)", Octopart=https://octopart.com/ss14-e3%2F61t-vishay-39552847, RoHS=TRUE, Standoff Height=0mm, Temperature Range High=+150°C
EN IO: library part CMP-26321-000002-1, "SWITCH TACTILE SPST-NO 0.05A 12V", Case/Package=SMD/SMT, Current Rating=50mA, Max Operating Temperature=70°C, Max Voltage Rating (DC)=12V, Min Operating Temperature=-20°C, Operating Force=1.6N, Package Quantity=1000, Ratings=IP40, Actuator Type=Standard, Contact Plating=Silver, Depth=10mm, Illumination Type=Illuminated, Length=6mm, Max Current Rating=50mA, Mechanical Life=100000Cycles, Mount="Surface Mount", Orientation=Straight, Packaging="Tape and Reel", Radiation Hardening=No, REACH SVHC="No SVHC", RoHS Compliant=Yes, Series=LSH, Switch Function=Off-Mom, Switch Travel=0.25mm, Termination="Gull Wing", Throw Configuration=SPST, Voltage Rating (AC)=12V, Voltage Rating (DC)=12V
I2C1 I2C2 PR SPI: library part CMP-02766-000562-1, "CONN HEADER VERT 4POS 2.54MM", Color=Black, Contact Resistance=15mR, Max Operating Temperature=105°C, Min Operating Temperature=-40°C, Connector Type="Male Pin", Contact Material=Brass, Contact Mating Length=0.185inch, Contact Plating=Gold, Depth=2.48mm, Gender=Male, Height=6.4mm, Housing Color=Black, Housing Material=Polymer, Length=29.64mm, Mount="Through Hole", Number of Contacts=4, Number of Positions=4, Number of Rows=1, Orientation=Straight, Packaging=Rail/Tube, Pitch=2.54mm, Radiation Hardening=No, Termination=Solder
J1: library part CMP-04767-000004-1, "CONN RCP USB3.1 TYPEC 24P SMD RA", Current Rating=0.25/1.25/5A, Manufacturer=Molex, Manufacturer Part Number=1054500101, Package=0, Temperature="-30°C to +85°C", Temperature Range High=+85°C, Temperature Range Low=-30°C, Voltage Rating=30V, Automotive=No, Category=Conn, ComponentLink2Description=Datasheet, ComponentLink2URL=https://www.molex.com/webdocs/datasheets/pdf/en-us/1054500101_IO_CONNECTORS.pdf, Conn Orientation="Right Angle", Contact Material=Gold,Nickel, Device Class L1=Connectors, Device Class L2="USB Connectors", Device Class L3=unset, Digikey Description="CONN RCP USB3.1 TYPEC 24P SMD RA", Footprint Url=https://www.molex.com/pdm_docs/sd/1054500101_sd.pdf, Height=3.44mm, Is Female=yes, Lead Free=Yes, Mouser Description="USB Shielded I/O Receptacle; Type C; Right Angle; Surface Mount; Gold over Nickel", Number of Contacts=24, Octopart=https://octopart.com/105450-0101-molex-68082325, Pitch=0.5mm, RoHS=TRUE, Shielding=true, Usb Standard="USB 3.1"
J2 J3: library part CMP-15831-000096-1, "CONN HEADER VERT 20POS 1.27MM", Case/Package=SIL, Contact Resistance=30mR, Current Rating=1A, Flammability Rating="UL94 V-0", Housing Color=Black, Insulation Resistance=1GR, Max Operating Temperature=105°C, Min Operating Temperature=-40°C, Package Quantity=300, Voltage Rating=500V, Connector Type=Header, Contact Finish - Mating=GOLD, Contact Gender=Male, Contact Material=Brass, Contact Plating=Gold, Contact Shape=Square, Contact Type="Male Pin", Depth=2.5mm, Fastening Type=Pull, Gender=Male, Housing Material=Nylon, Insulation Color=Black, Insulation Material=Nylon, Length=25.4mm, Mated Stacking Heights=11mm, Max Current Rating=1A, Mount="Through Hole", Number of Contacts=20, Number of Positions=20, Number of Rows=1, Orientation=Straight, Packaging=Bulk, Pitch=1.27mm, Reach SVHC Compliant=Yes, Series=M52, Termination=Solder
LED1 LED2: library part CMP-1426-00016-1, "SMD mono-color Chip LED, WL-SMCW, Bright Green", Color="Bright Green", Manufacturer="Wuerth Elektronik", PartNumber=150120VS75000, ComponentLink1Description="Manufacturer URL", ComponentLink1URL=http://www.we-online.com, ComponentLink2Description=Datasheet, ComponentLink2URL=http://katalog.we-online.com/led/datasheet/150120VS75000.pdf, PackageReference=1206_A
MD1: library part CMP-194065-000026-1, "RX TXRX MOD WIFI TRACE ANT SMD"
Q1 Q2: library part CMP-20235-000001-1, "NPN TRANSISTOR 1.5A 40V SOT-23 R", Case/Package=TO-236-3, Collector Emitter Breakdown Voltage=25V, Collector Emitter Voltage (VCEO)=400mV, Max Collector Current=1.5A, Max Power Dissipation=300mW, Transition Frequency=100MHz, Max Breakdown Voltage=25V, Mount="Surface Mount", Packaging="Tape and Reel", RoHS Compliant=Yes
R1 R2 R3 R4 R5 R11 R12: library part CMP-2003-04902-2, "RES SMD 10K OHM 5% 1/4W 1206", Manufacturer=Yageo, Manufacturer Part Number=AC1206JR-0710KL, Package=AC1206, Power Rating=0.25W, Resistance=10KΩ, Temperature="-55°C to +155°C", Temperature Range High=+155°C, Temperature Range Low=-55°C, Tolerance=0.05, Voltage Rating=200V, Automotive=Yes, Automotive Grade="Grade 0", Category=Res, ComponentLink2Description=Datasheet, ComponentLink2URL=http://www.yageo.com/NewPortal/yageodocoutput?fileName=/pdf/R-Chip/PYu-AC_51_RoHS_L_6.pdf, Composition="Thick Film", Device Class L1="Passive Components", Device Class L2=Resistors, Device Class L3="Chip SMD Resistors", Digikey Description="RES SMD 10K OHM 5% 1/4W 1206", Footprint Url=http://www.yageo.com/exep/pages/download/literatures/PYu-R_Mount_10.pdf, Height=0.65mm, Ipc Land Pattern Name=RESC310160X55, Lead Free=Yes, Mouser Description="Res Thick Film 1206 10K Ohm 5% 0.25W(1/4W) ±100ppm/C Epoxy Pad SMD Automotive T/R", Octopart=https://octopart.com/ac1206jr-0710kl-yageo-30511262, RoHS=TRUE, Series=AC
R6: library part CMP-2003-00221-1, Manufacturer=Panasonic, Part Number=ERJ-8ENF2212V
R7: library part CMP-2003-03778-1, Manufacturer=Yageo, Part Number=RC1206FR-0747K5L
R8 R9: library part CMP-2003-00541-1, Manufacturer=Panasonic, Part Number=ERJ-8GEY0R00V
R10: library part CMP-2003-00742-1, Manufacturer=Panasonic, Part Number=ERJ8BQF4R7V
R13: library part CMP-08839-020936-1, "Thick Film Chip Resistor, 1206, 470Ω, 5%, 200ppm/°C, 0.25W, 200V", Case Code (Imperial)=1206, Case Code (Metric)=3216, Max Operating Temperature=155°C, Max Power Dissipation=250mW, Min Operating Temperature=-55°C, Package Quantity=5000, Resistance=470R, Resistor Type="Thick Film", Temperature Coefficient=200ppm/°C, Tolerance=5%, Voltage Rating (DC)=200V, Case/Package=1206, Height=0.026inch, Lead Free="Lead Free", Length=0.12inch, Number of Terminations=2, Packaging="Tape and Reel", RoHS Compliant=Yes, Width=0.061inch
R14: library part CMP-2003-02029-1, Manufacturer="Vishay Dale", Part Number=CRCW12062K00FKTA
U1: library part CMP-08093-000004-1, "IC BRIDGE USB TO UART 28QFN", Ambient Temperature Range High=+85°C, Ambient Temperature Range Low=-40°C, Manufacturer="Silicon Labs", Max Junction Temp=+105°C, Max Supply Voltage=5.25V, Min Supply Voltage=1.71V, Nominal Supply Current=195-13700uA, Temperature="-40°C to +85°C", Automotive=No, Category=IC, ComponentLink2Description=Datasheet, ComponentLink2URL=https://media.digikey.com/pdf/Data%20Sheets/Silicon%20Laboratories%20PDFs/CP2102N_Rev.1.3_DS.pdf, Device Class L1="Integrated Circuits (ICs)", Device Class L2="Interface ICs", Device Class L3="USB Interface ICs", Digikey Description="IC BRIDGE USB TO UART 28QFN", Height=0.8mm, Interface=UART,USB,RS-232,RS-485, Ipc Land Pattern Name=QFN50P500X500X75-28, Lead Free=Yes, Manufacturer Part Number=CP2102N-A01-GQFN28, Mouser Description="IC BRIDGE USB TO UART 28QFN", Number Of Ports=1, Octopart=https://octopart.com/cp2102n-a01-gqfn28-silicon+labs-74636024, Package=CP2102N-A01-GQFN28, RoHS=TRUE, Standoff Height=0mm, Temperature Range High=+85°C, Temperature Range Low=-40°C, Usb Standard="USB 2.0"
U2: library part CMP-209535-000001-1, "LDO Voltage Regulators 1A, 3.3V", Dropout Voltage=1.1V, Manufacturer="Advanced Monolithic Systems", Max Junction Temp=+125°C, Max Power Dissipation=1.2W, Max Supply Voltage=15V, Nominal Supply Current=5mA, Output Current=1A, Output Voltage=3.3V, Package=AMS1117, Temperature="-40°C to +125°C", Temperature Range Low=-40°C, Automotive=No, Category=IC, ComponentLink2Description=Datasheet, ComponentLink2URL=http://www.advanced-monolithic.com/pdf/ds1117.pdf, Device Class L1="Integrated Circuits (ICs)", Device Class L2="Power Management ICs", Device Class L3="Voltage Regulators - Linear", Height=1.8mm, Ipc Land Pattern Name=SOT229P700X180-4, Lead Free=Yes, Manufacturer Part Number=AMS1117-3.3, Number Of Outputs=1, Octopart=https://octopart.com/ams1117-3.3-advanced+monolithic+systems-25899300, Output Type=Fixed, RoHS=TRUE, Standoff Height=0.64mm, Temperature Range High=+125°C
U3: library part CMP-0133-00143-2, "IC CONTROLLR LI-ION 4.2V SOT23-5", Case/Package=SOT-23, Drain to Source Resistance=350mR, Max Charge Current=500mA, Max Input Voltage=6V, Max Operating Temperature=85°C, Max Output Voltage=4.5V, Max Power Dissipation=1.54W, Min Operating Temperature=-40°C, Min Output Voltage=4.168V, Min Supply Voltage=3.75V, Output Voltage=4.2V, Voltage Rating=4.534V, Contact Plating=Tin, Height=0.051inch, Lead Free="Lead Free", Length=0.122inch, Max Supply Voltage=6V, Mount="Surface Mount", Number of Cells=1, Number of Channels=1, Number Of Outputs=1, Number of Pins=5, Output Current=500mA, Packaging="Tape and Reel", Radiation Hardening=No, REACH SVHC="No SVHC", Termination=SMD/SMT, Weight=0.00709oz, Width=0.071inch

## Via types
v1: diameter 50, hole 28, Top Layer to Bottom Layer, 18 vias

## Nets (pads, with @x,y where several pads share a name; then routed paths per layer and width w, separated by ;. In a path a pad name is that pad's centre, name@x,y a point inside that pad or via, vN(x,y) a via of type N, cw(c..) or ccw(c..) an arc to the next point about the centre after c; other vN are vias at no path point)
3V3: 3V3.1 C3.1 C4.1 C5.1 C6.1 C8.1 I2C1.3 I2C2.3 J2.1 MD1.2 R3.2 R4.2 R10.1 R11.1 R12.1 U1.6 U1.7 U2.2 U2.4 | length 10171.6
  Top Layer w10: R4.2 1537.01,1960 R3.2 1556.69,1940.31 1556.69,1797.32 1595,1759.01 1595,1695 1545,1645 1265,1645 1140,1770 1140,1938.42 1251.58,2050 1350,2050 ; C5.1@1760.99,3020.04 C3.1 2112.72,3020.04 2189.02,3096.34 2351.97,3096.34 MD1.2 ; C5.1 1707.87,3038.7 1576.57,3170 J2.1 1527.95,3152.95 1525.56,3152.95 1460,3087.39 1460,2160 1350,2050 ; 3V3.1 1735,2060 1735,2050 ; 2855,1779.41 2855.59,1779.41 2865.39,1769.61 2865.39,1761.07 U1.7 2865.51,1705.13 2881.15,1689.49 2881.15,1663.59 2886.81,1657.93 2886.81,1573.19 2908.31,1551.69 2995.74,1551.69 3020.64,1526.79 3076.79,1526.79 3143.94,1593.94 3198.94,1593.94 3310,1705 3310,1875 3265.84,1919.16 3240.87,1919.16 3235.04,1925 3235.04,1929.92 3235.04,1993.57 cw(c3278.81,2037.7) 3221.57,2013.47 cw(c3278.81,2037.7) 3220.87,2015.21 3219.44,2016.64 3218.03,2018.04 3216.2,2018.8 3132.72,2053.47 ccw(c3128.81,2044.26) 3132.66,2053.49 cw(c3149.95,2094.95) 3116.47,2065 3101.47,2080 2979.24,2080 2963.69,2064.45 2763.91,2064.45 2755,2073.36 2755,2190 2690,2255 2260,2255 2055,2050 1735,2050 ; C4.1@3235.04,1959.92 C4.1@3257.09,1981.97 ; C4.1@3257.09,1951.97 C6.1 3257.09,2187.64 3266.97,2197.52 3351.81,2197.52 3374.29,2220 3460,2220 3505.28,2174.72 U2.4 ; R10.1 3505.28,1780.83 3505.28,1845 U2.4 ; C8.1 3653.97,2316.3 3604.44,2266.78 3604.44,2157.68 U2.2@3762.12,2000 ; U2.2 U2.2@3762.12,2000 ; R11.1 3728.42,1130 3683.89,1085.47 3566.69,1085.47 3532.01,1120.16 R12.1 3532.01,1302.01 v1(3540,1310) 3540,1317.5 3850,1627.5 I2C2.3 3852.5,1637.5 4037.5,1637.5 I2C1.3 ; 1350,2050 1735,2050 ; U2.4 U2.2@3762.12,2000
  Bottom Layer w10: v1(3505,1845) 3505,1345 v1(3540,1310) v1@3540,1300
5V: 5V.1 C7.1 C9.1 D3.1 J2.19 LED2.2 PR.3 R6.1 U2.3 U3.4 | length 5636.7
  Top Layer w10: LED2.2 2125,1211.01 2159.01,1245.02 2159.01,1245.99 2193.03,1280 2217.91,1280 C9.1 v1(2320.03,1275) 2415.03,1370 U3.4 ; R6.1 3169.34,1505.35 3195,1479.69 D3.1 3215,1310 5V.1 3412.35,1310 3573.89,1471.54 3623.01,1471.54 3831.39,1679.92 3858.45,1679.92 3995,1816.47 3995,2020 3968.01,2046.99 3906.99,2046.99 3863.81,2090.16 U2.3
  Bottom Layer w10: J2.19 1542.61,2270 1507.95,2235.35 1507.95,2204.65 1947.78,1764.83 2298.9,1764.83 2691.86,1371.86 ; v1(2320.03,1275) 2470,1275 2565,1370 2690,1370 2691.86,1371.86 ; PR.3 3375.91,1769.09 3375.91,1355.91 5V.1 3289.95,1269.95 3196.76,1269.95 3123.09,1343.62 2990.19,1343.62 2966.57,1320 2743.73,1320 2691.86,1371.86
CLK: J3.19 MD1.20 | length 1348.2
  Top Layer w10: MD1.20 2735,2459.21 v1(2735,2280)
  Bottom Layer w10: v1(2735,2280) 2785,2230 3837.61,2230 3867.61,2260 J3.19
CMD: J2.18 MD1.19 | length 1256.2
  Top Layer w10: J2.18 2022.82,2320 2067.82,2275 2536.42,2275 2671.65,2410.23 2671.65,2447.13 MD1.19
D+: D1.2 J1.A6 U1.4 | length 743.9
  Top Layer w10: U1.4 2831.72,1820 2810,1798.28 2810,1678.17 2846.81,1641.36 2846.81,1554.38 2838.02,1545.59 2820.46,1545.59 2809.87,1535 2775,1535 2765,1525 2765,1480 2772.24,1472.76 2818.78,1472.76 2844.61,1498.58 D1.2 2846.57,1498.58 2855.32,1489.84 J1.A6
D-: D1.1 J1.A7 U1.5 | length 652.2
  Top Layer w10: D1.1@2800.24,1504.41 D1.1 2795.39,1498.58 2811.81,1515 2818.16,1515 2828.16,1525 2865,1525 ; U1.5 2861.76,1800.32 2861.13,1799.68 2839.68,1799.68 2830,1790 2830,1686.45 2866.81,1649.64 2866.81,1546.09 2865,1544.28 2865,1525 ; J1.A7 2893.78,1304.33 2893.78,1312.2 2880.59,1325.39 2880.59,1465.88 2890,1475.29 2890,1500 2865,1525
DTR: Q1.2 R2.1 U1.28 | length 1459.4
  Top Layer w10: Q1.2 2557.6,2062.6 2515,2020 2432.01,2020 2376.54,1964.53 2366.69,1964.53 2352.01,1949.84 2352.01,1987.01 2405,2040 2405,2110 2390.47,2124.53 2324.53,2124.53 2275,2075 2275,1918.3 2342.51,1850.79 2758.49,1850.79 2809.39,1901.69 2895.04,1901.69
EN: C1.1 EN.2 EN.4 J2.2 MD1.3 Q2.3 R4.1 | length 4354.3
  Top Layer w10: EN.4@1373.58,1821.85 1373.58,1808.07 1480.04,1701.61 1488.35,1701.61 C1.1 ; EN.4 EN.2 1197.83,1915.98 1232.01,1950.16 R4.1 1232.01,1969.84 1260.84,1998.67 1260.84,2000.84 1270,2010 v1(2105,2010) 2305,2210 2690,2210 2715,2185 2715,1970 2670.75,1925.75 2670.75,1921.81 2663.94,1915 Q2.3 ; J2.2 1547.39,3120 1684.01,2983.39 2207.56,2983.39 2224.18,3000 v1(2235,3000) 2294.06,3059.06 MD1.3
  Bottom Layer w10: v1(2105,2010) 2235,2140 v1(2235,3000)
GND: 1.1 3V3.2 5V.2 C1.2 C2.2 C3.2 C4.2 C5.2 C6.2 C7.2 C8.2 C9.2 C10.2 D1.3 D2.3 EN.1 EN.3 I2C1.4 I2C2.4 IO.1 IO.3 J1.A1 J1.A12 J2.14 J2.20 J3.1 J3.7 J3.20 LED1.1 MD1.1 MD1.15 MD1.38 MD1.39 PR.4 R5.1 R7.1 R14.1 U1.3 U1.29 U2.1 U3.2 | length 15400.9
  Top Layer w10: EN.1 EN.3 ; EN.3@1378.33,1446.67 1396.14,1464.49 1409.53,1464.49 1500.08,1555.04 C1.2 1509.92,1555.04 1624.96,1440 1836.3,1440 IO.1 ; J2.14 1542.61,2520 1507.95,2485.35 1507.95,2254.65 1542.61,2220 J2.20 1550,2225 1800,2225 3V3.2 ; C5.2@1771.3,3151.3 C5.2@1782.65,3139.96 ; C5.2@1782.65,3149.96 C3.2 2355.59,3149.96 MD1.1 2377.4,3146.34 2395.86,3146.34 2582.28,2959.91 2582.28,2922.95 MD1.39@2595,2910.24 ; 1.1 1875,1195.91 1866.81,1204.09 1855.99,1204.09 1829.09,1230.99 1829.09,1425.39 IO.1 ; C9.2 2087.09,1297.64 2017.17,1367.56 IO.3 ; U3.2 2300.76,1407.4 2181.57,1526.59 2181.57,1528.39 2164.92,1545.04 C2.2 ; v1(2495,2375) 2495,2449.21 MD1.15 2497.09,2472.56 2497.09,2586.87 2595,2684.78 MD1.39@2595,2800 ; C10.2 2602.91,1362.91 v1(2700,1460) ; R14.1 2623.15,1501.22 2635.87,1488.5 2671.5,1488.5 v1(2700,1460) ; MD1.39@2650.12,2855.12 2705.24,2855.12 2705.24,2800 2650.12,2800 MD1.39@2595,2800 ; J1.A1 2756.89,1343.11 2700,1400 v1(2700,1460) ; U1.29@2960,1805 U1.29 2940.32,1839.68 U1.3 2861.76,1839.68 2861.13,1840.32 2844.3,1840.32 2843.99,1840 2823.43,1840 2790,1806.57 2790,1669.88 2819.02,1640.87 D1.3@2819.02,1571.42 ; J1.A12@2994.33,1300 2994.33,1347.76 2970,1372.09 v1(2970,1380) 2963.43,1380 2938.43,1405 D2.3 2906.42,1463.43 2935.47,1492.48 2935.47,1502.32 2950.16,1517.01 R5.1 2997.01,1480 3076.85,1480 3170.78,1573.94 3243.94,1573.94 3345,1675 3345,1943.8 3350.86,1949.66 3363.31,1949.66 3379.96,1966.31 C4.2 ; 3381.61,1941.65 3381.61,1968.35 3381.61,1971.65 3381.61,2033.88 3392.91,2045.18 C6.2 ; 3382.17,1937.8 R7.1 3382.17,1760.24 3412.4,1730 3539.24,1730 3719.09,1909.84 U2.1 U2.1@3767.33,1909.84 ; LED1.1 3666.97,1640.94 3767.33,1741.3 U2.1@3767.33,1907.24 ; I2C2.4 3850,1827.17 U2.1@3767.33,1909.84 ; J3.7 J3.7@3872.39,2860 ; C7.2 C7.2@3913.97,1947.39 ; I2C1.4 4040,2040 J3.20 ; IO.1 IO.3 ; IO.3 2081.3,1436.3 2159.24,1514.24 2159.24,1544.28 C2.2 ; C2.2 2176.65,1561.69 2492.52,1561.69 2502.24,1571.42 D1.3@2819.02,1571.42 ; MD1.39@2595,2800 2595,2855.12 MD1.39@2595,2910.24 ; MD1.39@2595,2910.24 2650.12,2910.24 2705.24,2910.24 2954.06,3159.06 MD1.38 3054.61,3160 J3.1 3887.05,3142.95 3889.44,3142.95 3907.05,3125.35 3907.05,2894.65 J3.7@3872.39,2860 ; v1(2700,1460) 2700,1520 2735,1555 2788.19,1555 2798.78,1565.59 2813.19,1565.59 D1.3@2819.02,1571.42 ; U2.1@3767.33,1909.84 3804.88,1947.39 C7.2@3913.97,1947.39 ; J3.20 3655,2210 3655,2151.79 3748.8,2057.99 3803.37,2057.99 C7.2@3913.97,1947.39 ; J3.20 3872.39,2210 3907.05,2244.65 3907.05,2825.35 J3.7@3872.39,2860
  Bottom Layer w10: J2.20 1551.52,2213.48 1566.52,2213.48 1970,1810 2270,1810 2487.35,2027.35 2487.35,2367.35 v1(2495,2375) ; v1(2700,1460) 2700,1392.01 2747.01,1345 2935,1345 v1(2970,1380) 2980.82,1380 2990.82,1370 3176.57,1370 3216.57,1410 5V.2 3330,1778.53 3168.61,1939.92 3141.55,1939.92 3105.08,1976.39 3105.08,2050.08 PR.4
IO0: C2.1 IO.2 IO.4 J3.14 MD1.25 Q1.3 R3.1 | length 4848.7
  Top Layer w10: R3.1 1800,1955 1840,1915 IO.2 IO.4 ; v1(1995,1935) 1995,1924.18 2017.17,1902.01 IO.4 ; C2.1 C2.1@2160,1679.88 ; Q1.3 2679.76,2130.24 2635,2175 2330,2175 2255,2100 2255,1774.88 C2.1@2160,1679.88 ; MD1.25 3054.61,2510 J3.14 ; IO.4 2017.17,1816.22 2136.85,1696.54 2143.35,1696.54 C2.1@2160,1679.88
  Bottom Layer w10: v1(1995,1935) 2086.57,1935 2300,2148.43 2300,2236.57 2478.43,2415 2803.43,2415 2948.43,2270 3627.61,2270 3867.61,2510 J3.14
IO2: J3.15 MD1.24 | length 935.7
  Top Layer w10: MD1.24 2934.53,2460 J3.15
IO4: J3.13 MD1.26 | length 816.7
  Top Layer w10: MD1.26 3054.61,2560 J3.13
IO5: J3.10 MD1.29 SPI.1 | length 1160.5
  Top Layer w10: MD1.29 3054.61,2710 J3.10
  Bottom Layer w10: SPI.1 3659.33,2930.67 3659.33,2918.28 3867.61,2710 J3.10
IO12: J2.13 MD1.14 | length 844.9
  Top Layer w10: J2.13 1547.39,2570 1608.34,2509.06 MD1.14
IO13: J2.15 MD1.16 | length 1158.2
  Top Layer w10: J2.15 1965.4,2470 2100.4,2335 2511.57,2335 2535,2358.43 2535,2396.02 2533.28,2397.73 2533.28,2458.76 MD1.16
IO14: J2.12 MD1.13 | length 844.9
  Top Layer w10: J2.12 1923.08,2620 1971.31,2571.77 2351.97,2571.77 MD1.13
IO15: J3.16 MD1.23 | length 1017.1
  Top Layer w10: MD1.23 2897.09,2447.13 2897.09,2428.67 2915.76,2410 J3.16
IO16: J3.12 MD1.27 | length 816.7
  Top Layer w10: MD1.27 3054.61,2610 J3.12
IO17: J3.11 MD1.28 | length 816.7
  Top Layer w10: MD1.28 3054.61,2660 J3.11
IO18: J3.9 MD1.30 SPI.2 | length 1295.2
  Top Layer w10: MD1.30 3054.61,2760 J3.9
  Bottom Layer w10: SPI.2 3579.92,2999.92 3671.13,2999.92 3764.4,2906.66 3764.4,2863.21 3867.61,2760 J3.9
IO19: J3.8 MD1.31 SPI.3 | length 1378.3
  Top Layer w10: MD1.31 3054.61,2810 J3.8
  Bottom Layer w10: SPI.3 3499.92,3019.92 3679.42,3019.92 3832.95,2866.39 3832.95,2844.65 3867.61,2810 J3.8
IO21: I2C1.1 I2C2.1 J3.6 MD1.33 R12.2 | length 3511.3
  Top Layer w10: MD1.33 3054.61,2910 3240,2910 3260,2890 3670,2890 3690,2910 J3.6 ; R12.2 3657.99,1137.99 3660,1140 3660,1141.85 3850,1331.85 ; I2C2.1 3850,1331.85 ; I2C1.1 4040,1160 3935,1055 3905,1055 3850,1110 3850,1331.85
  Bottom Layer w10: I2C2.1@3850,1415 3907.05,1472.05 3907.05,2875.35 3872.39,2910 J3.6
IO22: I2C1.2 I2C2.2 J3.3 MD1.36 R11.2 | length 3543.8
  Top Layer w10: MD1.36 3054.61,3060 J3.3 ; R11.2 3912.99,1472.01 I2C2.2 3852.5,1537.5 4037.5,1537.5 I2C1.2
  Bottom Layer w10: I2C2.2 3805.08,1490.08 3805.08,1398.87 3813.87,1390.08 3925.08,1390.08 3950,1415 3950,1590 ; J3.3 3872.39,3060 3950,2982.39 3950,1590 ; I2C1.2 4035.08,1544.92 3995.08,1544.92 3950,1590
IO23: J3.2 MD1.37 SPI.4 | length 1415.9
  Top Layer w10: MD1.37 3054.61,3110 J3.2
  Bottom Layer w10: SPI.4 3490,3110 J3.2
IO25: J2.9 MD1.10 | length 844.9
  Top Layer w10: J2.9 1923.08,2770 1971.31,2721.77 2351.97,2721.77 MD1.10
IO26: J2.10 MD1.11 | length 844.9
  Top Layer w10: J2.10 1923.08,2720 1971.31,2671.77 2351.97,2671.77 MD1.11
IO27: J2.11 MD1.12 | length 844.9
  Top Layer w10: J2.11 1923.08,2670 1971.31,2621.77 2351.97,2621.77 MD1.12
IO32: J2.7 MD1.8 | length 844.9
  Top Layer w10: J2.7 1923.08,2870 1971.31,2821.77 2351.97,2821.77 MD1.8
IO33: J2.8 MD1.9 | length 844.9
  Top Layer w10: J2.8 1923.08,2820 1971.31,2771.77 2351.97,2771.77 MD1.9
IO34: J2.5 MD1.6 | length 844.9
  Top Layer w10: J2.5 1547.39,2970 1597.39,2920 2353.74,2920 MD1.6
IO35: J2.6 MD1.7 | length 844.9
  Top Layer w10: J2.6 1547.39,2920 1577.39,2890 2315.28,2890 2328.94,2876.34 2335.59,2876.34 2352.87,2859.06 MD1.7
Net1_2: 1.2 C10.1 U3.3 | length 813.5
  Top Layer w10: 1.2 1884.87,1250 1912.4,1222.48 2108.19,1222.48 2139.01,1253.3 2139.01,1264.72 2244.29,1370 U3.3 2382.8,1370 2388.66,1375.86 2388.66,1380.93 2404.11,1396.38 2455.89,1396.38 2471.34,1380.93 2471.34,1269.26 C10.1
NetD2_1: D2.1 D2.2 D3.2 J1.A4 | length 860.3
  Top Layer w10: J1.A4 2815.94,1323.67 2815.46,1324.15 2833.58,1342.28 D2.2 2795.59,1379.41 v1(2765,1410) 2775.82,1410 2796.41,1430.59 D2.1 ; v1(3120,1415) 3120,1264.45 3195,1189.45 D3.2
  Bottom Layer w10: v1(2765,1410) 2772.65,1417.65 2788.51,1417.65 2790.86,1420 3115,1420 v1(3120,1415)
NetLED1_2: LED1.2 R10.2 | length 194.4
  Top Layer w10: R10.2 3567.87,1663.9 3663.03,1759.06 LED1.2
NetLED2_1: LED2.1 R13.2 | length 298.2
  Top Layer w10: LED2.1 2266,1050.94 2370.17,1155.11 R13.2
NetMD1_34: MD1.34 R9.2 | length 1153.2
  Top Layer w10: R9.2 2835.83,2101.1 2852.48,2117.76 2852.48,2197.48 v1(2965,2310) ; MD1.34 3065.39,2970.78 v1(3179.22,2970.78)
  Bottom Layer w10: v1(2965,2310) 2965,2756.57 v1(3179.22,2970.78)
NetQ1_1: Q1.1 R1.2 | length 136
  Top Layer w10: R1.2 2538.9,2080 2596.3,2137.4 Q1.1
NetQ2_1: Q2.1 R2.2 | length 107.6
  Top Layer w10: R2.2 2490.39,1952.4 Q2.1
NetR5_2: R5.2 U1.11 | length 81.9
  Top Layer w10: R5.2 U1.11
NetR13_1: R13.1 U3.1 | length 613.5
  Top Layer w10: R13.1 2259.83,1174.89 2299.55,1214.61 2412.64,1214.61 2414.78,1212.48 2488.19,1212.48 2496.97,1221.26 2496.97,1383.58 2464.18,1416.38 2406.16,1416.38 2388.66,1433.88 2388.66,1438.95 2382.8,1444.8 U3.1
NetR14_2: R14.2 U3.5 | length 124
  Top Layer w10: U3.5 2444.97,1444.8 2488.67,1488.5 2504.13,1488.5 2516.85,1501.22 R14.2
RTS: Q2.2 R1.1 U1.24 | length 1111.9
  Top Layer w10: R1.1 2330,2080 2300,2050 2300,1921.58 2341.58,1880 2578.07,1880 Q2.2 2690.91,1877.6 v1(2755,1941.69) ; U1.24 2979.68,1916.4 2980,1916.72 2980,1955 v1(3025,2000)
  Bottom Layer w10: v1(2755,1941.69) 2755,1951.84 2778.21,1975.05 2778.21,1984.44 2793.77,2000 v1(3025,2000)
Rx: PR.2 R8.1 U1.25 | length 403.9
  Top Layer w10: 2960,1925 2958.78,1926.22 2958.78,1951.22 2950,1960 2950,1977.24 2933.35,1993.9 R8.1 2946.65,2010.55 2978.98,2010.55 3008.43,2040 3041.57,2040 3075,2006.57 3075,1970 PR.2
RX0: J3.5
SD0: J3.18 MD1.21 | length 1255.5
  Top Layer w10: MD1.21 2784.37,2360.63 v1(2790,2355)
  Bottom Layer w10: v1(2790,2355) 2895,2250 3807.61,2250 3867.61,2310 J3.18
SD1: J3.17 MD1.22 | length 1087.8
  Top Layer w10: MD1.22 2847.09,2447.13 2847.09,2428.67 2909.92,2365.83 3864.17,2365.83 J3.17
SD2: J2.16 MD1.17 | length 1189.9
  Top Layer w10: J2.16 1984.54,2420 2089.54,2315 2519.85,2315 2571.65,2366.8 2571.65,2447.13 MD1.17
SD3: J2.17 MD1.18 | length 1223
  Top Layer w10: J2.17 2003.68,2370 2078.68,2295 2528.14,2295 2621.65,2388.52 2621.65,2447.13 MD1.18
SV+: J2.3 MD1.4 | length 885.6
  Top Layer w10: J2.3 1547.39,3070 1657.39,2960 2251.57,2960 2287.91,2996.34 2351.97,2996.34 MD1.4
SV-: J2.4 MD1.5 | length 860.7
  Top Layer w10: J2.4 1547.39,3020 1627.39,2940 2259.85,2940 2278.91,2959.06 MD1.5
Tx: PR.1 R9.1 U1.26 | length 823.8
  Top Layer w10: U1.26 2940.32,1916.4 2938.78,1917.94 2938.78,1936.22 2926.81,1948.19 2841.81,1948.19 2825,1965 R9.1 2825,2034.45 2835,2044.45 2971.98,2044.45 2987.53,2060 3069.14,2060 3095,2034.14 3095,1986.47 3131.43,1950.04 3158.49,1950.04 3194.92,1913.61 3194.92,1839.92 PR.1
TX0: J3.4 MD1.35 R8.2 | length 2428.8
  Top Layer w10: R8.2 2940.83,2106.1 2957.48,2122.76 2957.48,2177.48 3105,2325 v1(3115,2325) ; MD1.35 3105.94,3009.06 3106.89,3010 3161.86,3010 3162.65,3010.78 3195.78,3010.78 3196.57,3010 3260,3010 3280,3030 3680,3030 3700,3010 J3.4
  Bottom Layer w10: v1(3115,2325) 3122.65,2332.65 3122.65,2348.51 3125,2350.86 3125,2645 3380.42,2900.42 3380.42,2947.78 3380.42,2972.13 3448.21,3039.92 3837.69,3039.92 3867.61,3010 J3.4
VBUS_T: R6.2 R7.2 U1.8 | length 561.2
  Top Layer w10: 2900,1715 2900,1698.93 2906.81,1692.12 2906.81,1625.76 2926.08,1606.49 3044.65,1606.49 3058.79,1592.34 3082.34,1592.34 R6.2 3238.5,1748.5 3266.1,1748.5 3277.83,1760.24 R7.2
pads on no net: J1.1 J1.2 J1.3 J1.4 J1.A2 J1.A3 J1.A5 J1.A8 J1.A9 J1.A10 J1.A11 J1.B1 J1.B2 J1.B3 J1.B4 J1.B5 J1.B6 J1.B7 J1.B8 J1.B9 J1.B10 J1.B11 J1.B12 MD1.32 U1.1 U1.2 U1.9 U1.10 U1.12 U1.13 U1.14 U1.15 U1.16 U1.17 U1.18 U1.19 U1.20 U1.21 U1.22 U1.23 U1.27
copper on no net: | length 22312.3
  Top Layer w0: 1000,1235 1000,3275 ; 1000,1235 1235,1000 ; 1000,1235 1000,3275 ; 1000,1235 1235,1000 ; 1000,3275 1180,3455 ; 1000,3275 1180,3455 ; 1180,3455 2340,3455 ; 1180,3455 2340,3455 ; 1235,1000 3935,1000 ; 1235,1000 3935,1000 ; 2340,3430 2510,3200 ; 2340,3430 2340,3455 ; 2340,3430 2510,3200 ; 2340,3430 2340,3455 ; 2510,3200 2915,3200 ; 2510,3200 2915,3200 ; 2915,3200 3080,3455 ; 2915,3200 3080,3455 ; 3080,3455 4055,3455 ; 3080,3455 4055,3455 ; 3935,1000 4260,1325 ; 3935,1000 4260,1325 ; 4055,3455 4260,3250 ; 4055,3455 4260,3250 ; 4260,1325 4260,3250 ; 4260,1325 4260,3250

## Silkscreen, mask and mechanical layers (free items; w line width, h text height)
Top Overlay:
  text "3V3" at 1295,3150 h40
  text "GND" at 3935,3135 h40
  text "EN" at 1345,3095 h30
  text "IO23" at 3935,3085 h30
  text "SV+" at 1330,3040 h30
  text "IO22" at 3930,3040 h30
  text "SV-" at 1330,2995 h30
  text "TX" at 3950,2985 h30
  text "IO34" at 1315,2950 h30
  text "RX" at 3955,2930 h30
  text "IO35" at 1315,2900 h30
  text "IO21" at 3955,2885 h30
  text "IO32" at 1315,2850 h30
  text "GND" at 3970,2825 h40
  text "IO33" at 1315,2800 h30
  text "IO19" at 3955,2780 h30
  text "CS" at 3680,2765 h60 r90
  text "IO25" at 1315,2750 h30
  text "IO18" at 3955,2735 h30
  text "CLK" at 3575,2710 h60 r90
  text "IO26" at 1315,2700 h30
  text "MOSI" at 3365,2690 h60 r90
  text "IO15" at 3955,2690 h30
  text "MISO" at 3465,2675 h60 r90
  text "IO27" at 1315,2650 h30
  text "IO17" at 3955,2635 h30
  text "IO14" at 1315,2610 h30
  text "IO16" at 3955,2580 h30
  text "IO12" at 1315,2570 h30
  text "IO4" at 3955,2535 h30
  text "GND" at 1295,2505 h40
  text "IO0" at 3955,2485 h30
  text "IO13" at 1315,2455 h30
  text "IO2" at 3955,2435 h30
  text "SD2" at 1330,2405 h30
  text "IO15" at 3955,2385 h30
  text "SD3" at 1325,2355 h30
  text "SD1" at 3955,2330 h30
  text "CMD" at 1325,2310 h30
  text "SD0" at 3955,2280 h30
  text "5V" at 1339.99,2250 h40
  text "CLK" at 3955,2235 h30
  text "GND" at 1300,2190 h40
  text "GND" at 3965,2175 h40
  text "GND" at 4105,1710 h40
  text "3V3" at 4105,1625 h40
  text "SCL" at 4120,1535 h40
  text "SDA" at 4120,1440 h40
Mechanical 1:
  the board outline again, w0